# Altium PCB CEM3340_vco.PcbDoc (part 2 of 2)
Units mm, origin at the board's own origin, x right, y up, seen from the top; angles counter-clockwise.
Board outline 94 x 100 mm, 2 copper layers (Top Layer, Bottom Layer), stack 1.584 mm thick; 145 components, 81 nets, 415 pads, 466 vias.
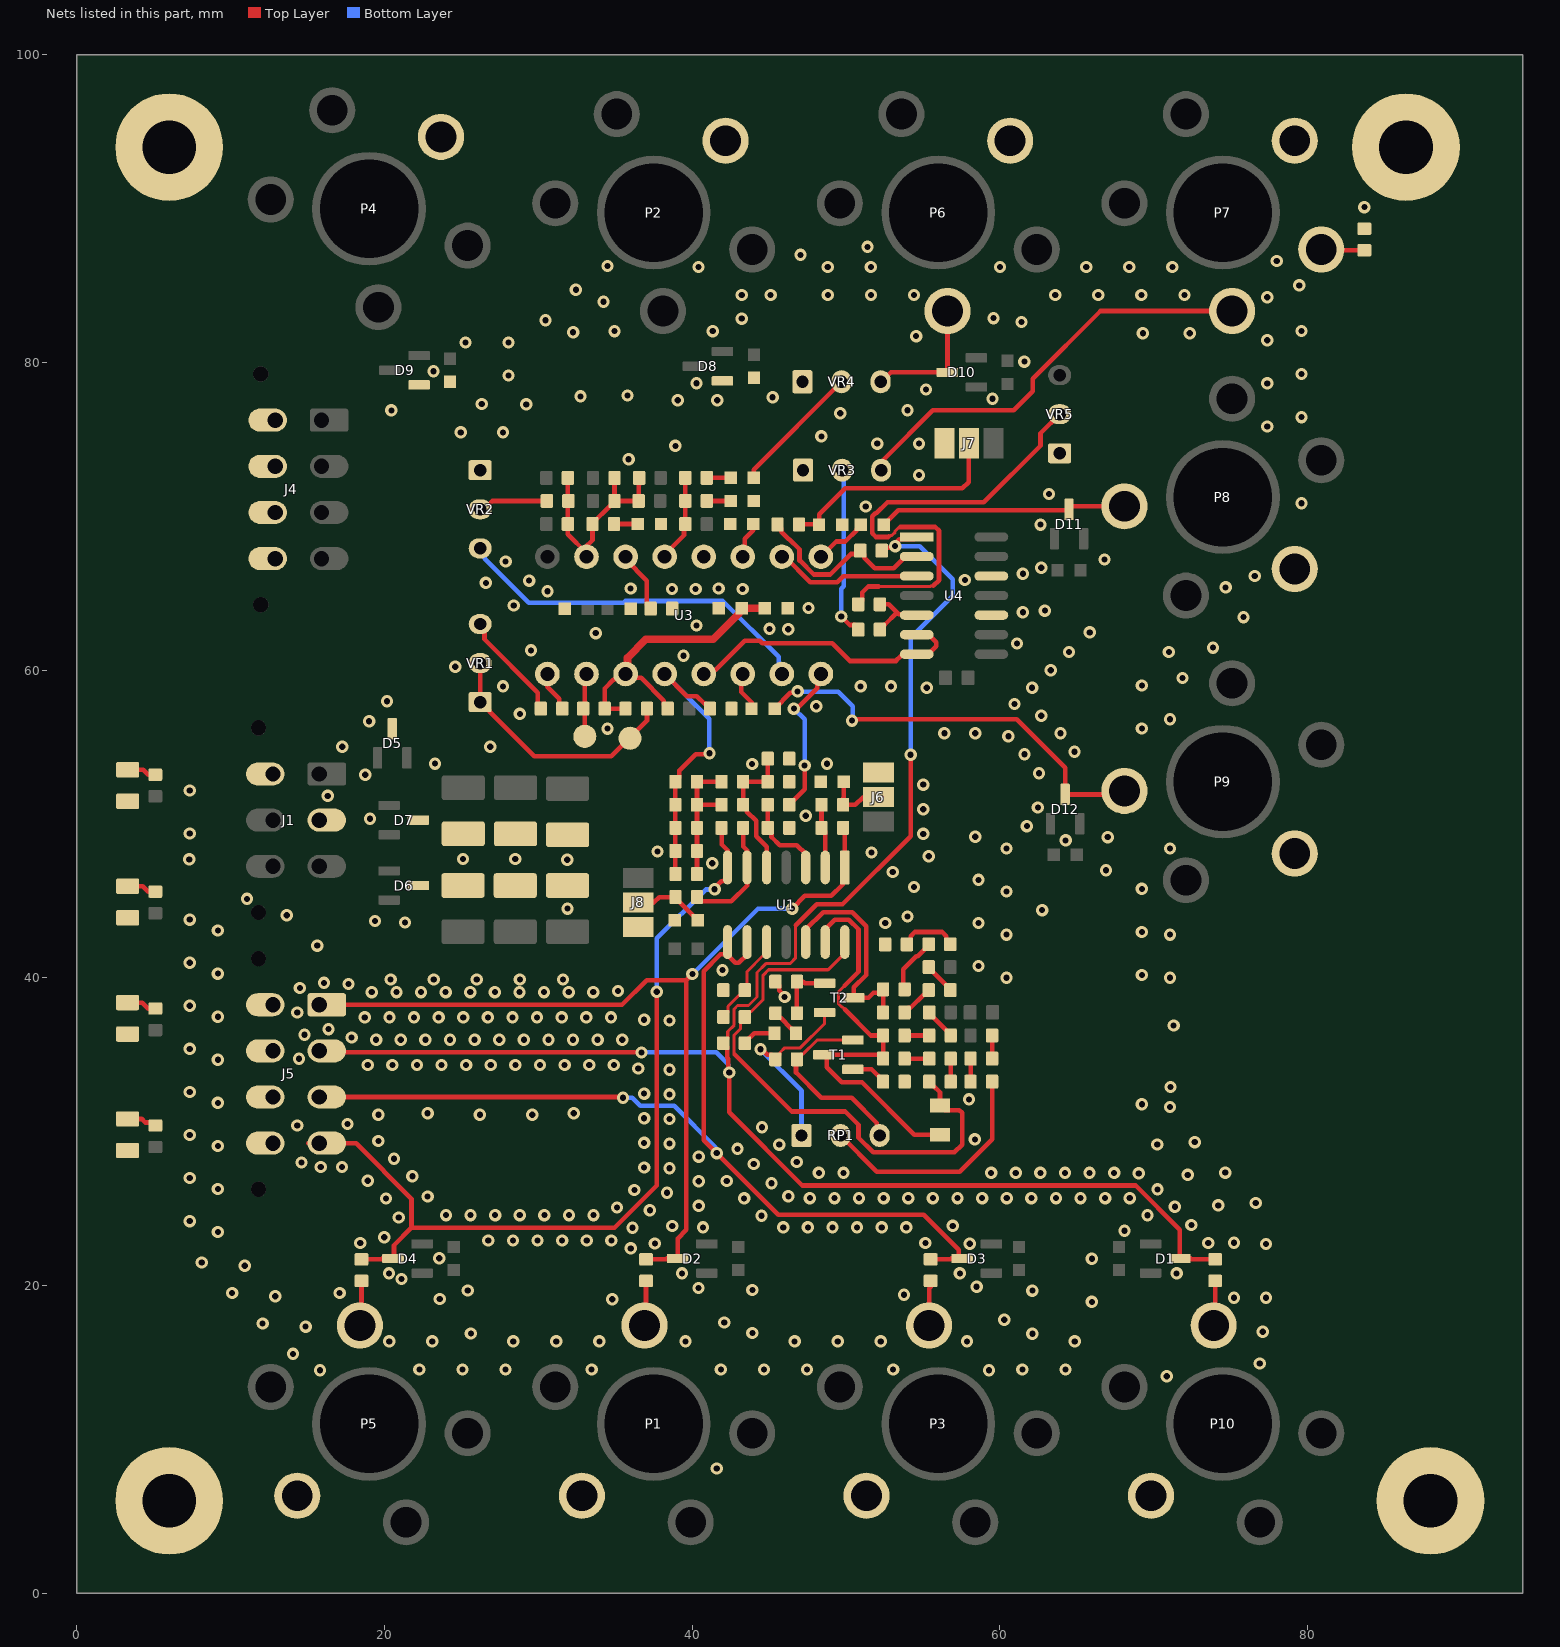
[diagram p2: the nets of this part, all layers, seen from the top]

## Via types
v1: diameter 0.8, hole 0.4, Top Layer to Bottom Layer, 466 vias

## Nets (pads, with @x,y where several pads share a name; then routed paths per layer and width w, separated by ;. In a path a pad name is that pad's centre, name@x,y a point inside that pad or via, vN(x,y) a via of type N, cw(c..) or ccw(c..) an arc to the next point about the centre after c; other vN are vias at no path point) (continued)
GND: C3.2 C5.1 C6.1 C7.1 C8.2 C11.1 C12.1 C13.1 C18.1 C19.1 C23.1 C24.2 CK1.2 CK3.2 CK4.2 CK5.2 CK6.2 CK7.2 D5.3 D6.3 D7.3 D8.1 D9.1 DL1.1 DL2.1 DL3.1 DL4.1 J1.2 J1.4 J4.5 J4.6 J4.7 J4.8 J5.5 J5.6 J5.7 J5.8 J6.1 J7.1 J8.1 P1.1 P2.1 P3.1 P4.1 P5.1 P6.1 P7.1 P8.1 P9.1 P10.1 pad.2 R6.1 R15.1 R17.1 R33.1 R34.1 R36.2 R43.1 R55.2 R56.2 R58.1 U3.12 U4.10 U4.12 VR2.1 VR3.1 VR4.1 VR5.1 | length 1.3
  Top Layer w0.3: R33.1@45.41,39.75 45.66,39.5 45.66,39.173 46.008,38.825 46.008,38.81 v1(46.008,38.747)
  other v1: 41.6,8.1 70.85,14.1 15.8,14.484 59.3,14.484 22.263,14.535 25.063,14.535 27.863,14.535 33.463,14.535 41.863,14.535 44.663,14.535 47.463,14.535 53.063,14.535 61.463,14.535 64.263,14.535 76.9,14.93 14.054,15.552 20.302,16.365 23.102,16.365 28.367,16.365 31.167,16.365 33.967,16.365 39.567,16.365 46.662,16.365 49.462,16.365 52.262,16.365 57.862,16.365 64.869,16.365 62.115,16.866 25.614,16.879 43.915,16.904 77.089,16.994 14.871,17.322 12.075,17.532 42.085,17.588 60.285,17.767 65.985,18.932 34.802,19.1 23.585,19.123 75.22,19.2 77.3,19.2 12.891,19.302 53.765,19.4 10.095,19.512 17.08,19.512 25.415,19.672 62.115,19.666 43.915,19.704 40.416,19.835 58.491,19.917 21.104,20.419 20.289,20.785 39.343,20.785 57.401,20.785 71.496,20.785 10.911,21.282 8.115,21.492 65.985,21.732 23.558,21.768 36.004,22.411 77.3,22.7 37.572,22.731 58.044,22.715 73.547,22.761 18.423,22.766 55.159,22.766 75.22,22.774 26.747,22.928 28.347,22.928 29.947,22.928 31.547,22.928 33.147,22.928 34.747,22.928 19.98,23.134 9.165,23.47 68.107,23.56 36.117,23.754 40.7,23.778 45.919,23.778 47.519,23.778 49.119,23.778 50.719,23.778 52.319,23.778 53.919,23.778 38.702,23.864 56.94,23.873 72.454,23.929 7.335,24.181 20.928,24.423 44.507,24.53 23.99,24.572 25.59,24.572 27.19,24.572 28.79,24.572 30.39,24.572 31.99,24.572 33.59,24.572 69.602,24.568 37.248,24.886 35.11,25.072 71.38,25.115 40.432,25.173 74.198,25.209 76.636,25.357 20.1,25.65 43.376,25.662 47.649,25.678 49.249,25.678 50.849,25.678 52.449,25.678 54.049,25.678 55.649,25.678 57.249,25.678 58.849,25.678 60.449,25.678 62.049,25.678 63.649,25.678 65.249,25.678 66.849,25.678 68.449,25.678 22.8,25.787 46.254,25.8 38.367,26.03 36.241,26.204 70.249,26.246 9.165,26.27 45.16,26.648 40.432,26.773 42.244,26.793 18.907,26.81 7.335,26.981 21.81,27.1 72.218,27.188 69.034,27.287 48.234,27.322 49.834,27.322 59.434,27.322 61.034,27.322 62.634,27.322 64.234,27.322 65.834,27.322 67.434,27.322 74.656,27.337 38.522,27.622 36.878,27.672 15.85,27.7 17.229,27.7 44,27.9 14.6,28 46.797,28.026 20.614,28.241 40.432,28.373 42.948,28.881 9.165,29.07 45.666,29.157 70.238,29.168 38.522,29.222 36.878,29.272 72.676,29.317 19.6,29.387 58.377,29.5 7.335,29.781 44.534,30.288 14.328,30.4 17.589,30.5 38.522,30.822 36.878,30.872 19.6,31.1 26.2,31.1 29.6,31.1 22.8,31.2 32.3,31.2 71.065,31.607 69.235,31.783 9.165,31.87 58,32.1 38.522,32.422 36.878,32.472 7.335,32.581 71.1,32.9 38.522,34.022 36.492,34.111 18.907,34.328 20.507,34.328 22.107,34.328 23.707,34.328 25.307,34.328 26.907,34.328 28.507,34.328 30.107,34.328 31.707,34.328 33.307,34.328 34.907,34.328 9.165,34.67 14.435,34.741 7.335,35.381 19.456,35.972 21.056,35.972 22.656,35.972 24.256,35.972 25.856,35.972 27.456,35.972 29.056,35.972 30.656,35.972 32.256,35.972 33.856,35.972 35.456,35.972 17.863,36.116 14.803,36.298 16.36,36.666 71.3,36.9 38.522,37.222 36.878,37.272 18.718,37.428 20.318,37.428 21.918,37.428 23.518,37.428 25.118,37.428 26.718,37.428 28.318,37.428 29.918,37.428 31.518,37.428 33.118,37.428 34.718,37.428 9.165,37.47 14.328,37.751 7.335,38.181 19.173,39.072 20.773,39.072 22.373,39.072 23.973,39.072 25.573,39.072 27.173,39.072 28.773,39.072 30.373,39.072 31.973,39.072 33.573,39.072 35.172,39.145 14.498,39.342 17.662,39.597 16.064,39.672 20.399,39.885 23.199,39.885 25.999,39.885 28.799,39.885 31.599,39.885 60.44,40.008 71.065,40.007 69.235,40.183 9.165,40.27 41.974,40.5 58.61,40.767 7.335,40.981 15.625,42.091 60.44,42.808 71.065,42.807 69.235,42.983 9.165,43.07 52.55,43.567 58.61,43.567 21.337,43.598 19.376,43.69 7.335,43.781 54.002,43.991 13.645,44.071 62.75,44.4 31.9,44.5 11.055,45.135 60.44,45.608 69.235,45.783 54.415,45.904 58.61,46.367 53.037,46.874 66.9,46.995 41.305,47.45 31.88,47.678 7.3,47.7 25.1,47.729 28.5,47.729 55.38,47.9 51.66,48.141 37.748,48.213 60.44,48.408 71.065,48.407 64.277,48.935 67.016,49.145 58.4,49.17 55.022,49.359 7.335,49.381 61.76,49.863 19.05,50.338 47.384,50.532 55.022,50.959 62.472,51.075 16.31,51.828 7.339,52.178 55.022,52.559 18.748,53.206 62.55,53.3 43.9,53.9 23.279,53.926 48.767,53.919 61.6,54.532 64.859,54.7 17.25,55.025 26.874,55.025 60.555,55.7 56.395,55.9 58.4,55.9 63.95,55.901 34.5,56.2 69.235,56.203 19,56.68 71.065,56.807 62.69,57.041 28.8,57.162 48.067,57.652 60.952,57.8 20.159,57.979 55.25,58.859 62.1,58.862 27.7,58.95 50.95,58.95 52.928,58.95 69.235,59.003 71.877,59.486 63.31,59.994 24.6,60.22 39.432,60.937 64.502,61.186 70.99,61.186 29.526,61.288 73.857,61.466 61.121,61.734 33.731,62.41 65.85,62.46 46.25,62.659 45.028,62.685 40.282,62.9 75.837,63.446 61.5,63.766 62.928,63.873 47.559,64.046 28.4,64.2 30.589,65.135 38.69,65.278 40.226,65.278 43.282,65.278 35.998,65.31 41.72,65.31 74.681,65.381 26.59,65.678 29.4,65.82 57.726,65.863 76.573,66.118 61.5,66.27 62.69,66.663 27.871,67.063 66.8,67.2 62.644,69.462 51.287,70.641 79.609,70.849 63.193,71.455 54.75,72.678 35.87,73.71 38.905,74.582 52.028,74.726 54.75,74.726 48.4,75.2 24.955,75.46 27.7,75.46 77.385,75.844 79.609,76.449 49.625,76.7 20.442,76.891 54,76.9 29.21,77.281 26.32,77.3 39.06,77.543 41.634,77.543 59.528,77.65 45.23,77.743 32.744,77.8 35.8,77.862 55.204,78.25 40.28,78.65 77.385,78.644 28.061,79.158 79.609,79.249 23.185,79.428 61.595,80.059 25.261,81.307 28.061,81.307 77.385,81.444 54.56,81.715 69.3,81.9 72.35,81.9 32.261,81.967 34.95,82.04 41.335,82.04 79.609,82.049 61.415,82.64 30.459,82.753 43.221,82.854 59.585,82.886 34.24,83.947 77.385,84.244 43.221,84.385 45.1,84.385 48.821,84.385 51.621,84.385 54.421,84.385 63.604,84.385 66.404,84.385 69.204,84.385 72.004,84.386 32.439,84.733 79.463,85.017 40.415,86.215 48.815,86.215 51.615,86.215 60.015,86.215 65.615,86.215 68.415,86.215 71.215,86.215 34.49,86.28 78,86.6 47.045,87 51.4,87.517 83.7,90.1
Hard_sync: C2.1 D12.3 P9.4 | length 27.8
  Top Layer w0.3: C2.1@45.36,57.5 46.386,58.526 46.762,58.526 v1(46.858,58.622) ; v1(50.394,56.718) 50.476,56.8 61.1,56.8 64.25,53.65 D12.3@64.25,51.92 67.87,51.92 P9.4@68.1,52.15
  Bottom Layer w0.3: v1(46.858,58.622) 46.88,58.6 49.495,58.6 50.443,57.652 50.443,56.767 v1(50.394,56.718)
Lin_FM: C4.1 VR4.2 | length 8.6
  Top Layer w0.3: C4.1@44,72.5 44,73.04 VR4.2@49.71,78.75
NetC1_2: C1.2 U3.9 | length 3.5
  Top Layer w0.3: U3.9@48.37,67.37 49.363,68.363 49.958,68.363 50.702,69.107 50.702,69.2 C1.2@50.952,69.45
NetC2_2: C2.2 U3.6 | length 2.6
  Top Layer w0.3: U3.6@43.29,59.75 43.18,59.64 43.18,58.58 43.86,57.9 C2.2@43.86,57.5
NetC3_1: C3.1 R13.2 | length 1.5
  Top Layer w0.3: R13.2@34.92,69.5 C3.1@36.47,69.5
NetC4_2: C4.2 R16.2 | length 1.6
  Top Layer w0.3: R16.2@40.95,72.5 C4.2@42.5,72.5
NetC5_2: C5.2 U3.11 | length 2.4
  Top Layer w0.3: U3.11@43.29,67.37 43.419,67.499 43.419,68.549 43.97,69.1 C5.2@43.97,69.5
NetC6_2: C6.2 R18.1 | length 1.6
  Top Layer w0.3: R18.1@40.95,71 C6.2@42.5,71
NetC8_1: C8.1 C24.1 R1.2 R2.2 R3.2 U3.3 | length 19.7
  Top Layer w0.3: R3.2@35.66,57.5 R2.2@34.31,57.5 34.31,58.81 34.876,59.376 34.944,59.376 35.318,59.75 U3.3@35.67,59.75 ; U3.3@35.799,59.879 35.979,59.879 35.979,59.793 36.271,59.501 36.68,59.501 38.16,58.021 38.16,57.75 R1.2@38.41,57.5
  Top Layer w0.5: U3.3@35.67,59.75 35.799,59.879 35.799,60.813 36.988,62.002 41.378,62.002 43.07,63.694 43.07,63.876 C8.1@43.22,64.026 ; C8.1@43.22,64.088 43.282,64.026 C24.1@44.72,64.026
NetC10_1: C10.1 R23.2 R27.1 T1.3 U1.13 | length 27.3
  Top Layer w0.2: 49.92,37.95 49.77,38.1 49.721,38.1 49.51,38.311 49.51,39.09 49.92,39.5
  Top Layer w0.3: U1.13@48.65,42.325 48.65,43.165 49.26,43.775 50.189,43.775 50.811,43.153 50.811,40.391 49.92,39.5 ; T1.3@48.75,34.844 48.75,34.188 49.727,33.211 51.039,33.211 54.45,29.8 C10.1@56.11,29.8 ; T1.3@49.241,35 52.16,35 R23.2@52.41,34.75 R27.1@52.41,36.25 51.62,36.25 49.92,37.95
NetC10_2: C10.2 R25.1 R57.2 U1.14 | length 36.3
  Top Layer w0.2: 42.783,35 42.726,35.057 42.726,36.277 43.148,36.7 43.148,37.173 R57.2@43.426,37.45 43.426,37.5 43.726,37.8 43.822,37.8 44.61,38.588 44.61,40.177 44.958,40.525 48.836,40.525 49.686,41.375 49.689,41.375 49.92,41.606 U1.14@49.92,42.325
  Top Layer w0.3: 42.783,35 46.473,31.31 49.94,31.31 50.811,30.439 50.811,29.614 51.776,28.65 57.05,28.65 57.55,29.15 57.55,31.224 57.374,31.4 56.41,31.4 C10.2@56.11,31.7 56.11,32.55 55.71,32.95 55.66,32.95 55.41,33.2 R25.1@55.41,33.25
NetC11_2: C11.2 J6.3 R40.2 | length 4
  Top Layer w0.3: C11.2@49.86,52.75 49.86,51.75 49.81,51.7 R40.2@49.81,51.25 50.61,51.25 51.11,51.75 J6.3@52.11,51.75
NetC12_2: C12.2 J7.3 R44.2 | length 15.1
  Top Layer w0.3: R44.2@46.95,69.475 48.225,69.475 C12.2@48.25,69.45 48.25,70.129 49.939,71.817 57.567,71.817 57.976,72.226 57.976,74.726 J7.3@58,74.75
NetC13_2: C13.2 J8.3 R51.2 | length 4.7
  Top Layer w0.3: J8.3@36.5,44.9 37.5,44.9 37.85,45.25 R51.2@38.91,45.25 38.91,45.2 C13.2@40.36,43.75
NetD10_3: D10.3 P6.4 VR4.3 | length 8.6
  Top Layer w0.3: VR4.3@52.25,78.75 52.317,78.75 52.926,79.359 D10.3@56.581,79.359 56.581,79.659 56.6,79.679 P6.4@56.6,83.35
NetDL1_2: DL1.2 R65.1 | length 1.9
  Top Layer w0.3: DL1.2@3.3,53.525 4.325,53.525 4.65,53.2 R65.1@5.1,53.2
NetDL2_2: DL2.2 R66.1 | length 1.9
  Top Layer w0.3: DL2.2@3.3,45.958 4.292,45.958 4.65,45.6 R66.1@5.1,45.6
NetDL3_2: DL3.2 R67.1 | length 2
  Top Layer w0.3: DL3.2@3.3,38.392 4.258,38.392 4.65,38 R67.1@5.1,38
NetDL4_2: DL4.2 R68.2 | length 2
  Top Layer w0.3: DL4.2@3.3,30.825 4.225,30.825 4.455,30.595 4.905,30.595 R68.2@5.1,30.4
NetP1_4: P1.4 R62.2 | length 2.9
  Top Layer w0.3: P1.4@36.9,17.4 37,17.5 R62.2@37,20.3
NetP3_4: P3.4 R63.2 | length 2.9
  Top Layer w0.3: P3.4@55.4,17.4 55.4,19.8 55.5,19.9 R63.2@55.5,20.3
NetP5_4: P5.4 R64.2 | length 2.8
  Top Layer w0.3: P5.4@18.5,17.5 R64.2@18.5,20.3
NetP7_5: P7.5 R6.2 | length 2.8
  Top Layer w0.3: P7.5@80.9,87.35 80.95,87.3 R6.2@83.7,87.3
NetP10_4: P10.4 R61.2 | length 3
  Top Layer w0.3: P10.4@74,17.25 R61.2@74,20.3
NetR2_1: R2.1 TP2.1 U3.2 | length 4.3
  Top Layer w0.3: TP2.1@33.02,55.5 33.02,59.64 U3.2@33.13,59.75
NetR3_1: R3.1 TP1.1 VR1.1 VR1.2 | length 16.4
  Top Layer w0.3: VR1.2@26.25,60.25 26.22,60.22 VR1.1@26.22,57.92 26.32,57.92 26.82,57.42 26.82,57.32 29.74,54.4 34.743,54.4 TP1.1@35.843,55.5 ; TP1.1@35.843,55.5 37.06,56.717 R3.1@37.06,57.5
NetR4_1: R4.1 VR1.3 | length 7
  Top Layer w0.3: VR1.3@26.5,63 26.5,62 29.965,58.535 29.965,57.695 R4.1@30.16,57.5
NetR4_2: R4.2 U3.1 | length 2.7
  Top Layer w0.3: U3.1@30.59,59.75 30.579,59.739 30.579,58.931 31.365,58.145 31.365,57.695 R4.2@31.56,57.5
NetR5_2: R5.2 R7.2 R8.2 R9.2 R10.2 R11.2 R12.1 R13.1 U3.15 | length 14.4
  Top Layer w0.3: R9.2@31.92,72.5 31.92,71 R5.2@31.92,69.5 31.92,68.83 33.13,67.62 U3.15@33.13,67.37 ; U3.15@33.02,67.62 33.02,67.946 33.52,68.446 33.52,69.55 34.67,70.7 34.7,70.7 34.95,70.95 R10.2@34.95,71 ; R8.2@34.95,72.5 R10.2@34.95,71 ; R11.2@36.55,72.5 36.55,72.05 36.52,72.02 R7.2@36.52,71 R10.2@34.95,71
NetR12_2: R12.2 VR2.2 | length 4.6
  Top Layer w0.3: VR2.2@26.25,70.25 27,71 R12.2@30.55,71
NetR14_1: R14.1 R16.1 R18.2 U3.13 | length 5.7
  Top Layer w0.3: U3.13@38.21,67.37 38.21,67.518 39.468,68.776 39.468,69.418 R14.1@39.55,69.5 R18.2@39.55,71 R16.1@39.55,72.5
NetR15_2: R15.2 R46.1 R47.1 R48.1 R49.1 R50.1 U3.4 | length 19.5
  Top Layer w0.3: U3.4@38.21,59.75 39.66,58.3 40.308,58.3 40.808,57.8 40.91,57.8 41.16,57.55 R15.2@41.16,57.5 ; R47.1@38.91,46.75 R49.1@38.91,48.25 R48.1@38.91,49.75 R46.1@38.91,51.25 R50.1@38.91,52.75 39.16,53 39.16,53.475 40.226,54.541 41.061,54.541 v1(41.12,54.6)
  Bottom Layer w0.3: U3.4@38.21,59.75 41.12,56.84 v1(41.12,54.6)
NetR17_2: R17.2 U3.14 | length 4
  Top Layer w0.3: U3.14@35.67,67.37 35.67,67.2 37.05,65.82 37.05,64.25 R17.2@37.3,64
NetR19_1: R19.1 R21.2 | length 2.1
  Top Layer w0.3: R19.1@55.38,40.7 55.38,40.65 56.525,39.505 56.53,39.505 56.78,39.255 R21.2@56.78,39.205
NetR20_1: R20.1 R22.2 | length 1.7
  Top Layer w0.3: R20.1@55.66,37.45 56.56,36.55 56.81,36.3 R22.2@56.81,36.25
NetR21_1: R21.1 R26.2 | length 2.2
  Top Layer w0.3: R26.2@53.81,37.75 53.81,37.8 54.06,38.05 54.194,38.05 55.049,38.905 55.13,38.905 55.38,39.155 R21.1@55.38,39.205
NetR22_1: R22.1 R27.2 | length 1.6
  Top Layer w0.3: R27.2@53.81,36.25 R22.1@55.41,36.25
NetR23_1: R23.1 R24.2 | length 1.6
  Top Layer w0.3: R23.1@53.81,34.75 R24.2@55.41,34.75
NetR24_1: R24.1 R25.2 | length 1.5
  Top Layer w0.3: R25.2@56.81,33.25 R24.1@56.81,34.75
NetR26_1: R26.1 R28.1 T2.3 U1.12 | length 14.2
  Top Layer w0.3: U1.12@47.38,42.325 47.38,43.146 48.509,44.275 50.396,44.275 51.311,43.36 51.311,40.184 50.51,39.383 T2.3@50.51,38.7 50.961,38.7 51.46,38.7 51.79,39.03 52.19,39.03 R28.1@52.41,39.25 R26.1@52.41,37.75
NetR28_2: R28.2 R32.1 | length 3.7
  Top Layer w0.3: R28.2@53.81,39.25 53.728,39.332 53.728,40.568 54.569,41.409 54.659,41.409 55.38,42.13 R32.1@55.38,42.18
NetR29_2: R29.2 R30.1 | length 2.2
  Top Layer w0.3: R29.2@43.426,35.75 43.426,35.8 44.026,36.4 R30.1@45.353,36.4
NetR30_2: R30.2 R31.1 | length 1.9
  Top Layer w0.3: R31.1@45.41,37.7 45.41,37.65 45.66,37.4 45.753,37.4 46.453,36.7 46.503,36.7 46.753,36.45 R30.2@46.753,36.4
NetR31_2: R31.2 R33.2 T2.1 | length 3.9
  Top Layer w0.3: R31.2@46.81,37.7 R33.2@46.81,39.75 47.21,39.75 47.31,39.65 T2.1@48.61,39.65
NetR32_2: R32.2 R36.1 | length 3.8
  Top Layer w0.3: R36.1@53.95,42.168 54.2,42.418 54.2,42.704 54.476,42.98 56.254,42.98 56.53,42.704 56.53,42.43 R32.2@56.78,42.18
NetR34_2: R34.2 T1.1 | length 2.3
  Top Layer w0.3: T1.1@50.45,34.05 51.66,34.05 52.41,33.3 R34.2@52.41,33.25
NetR35_1: R35.1 RP1.3 T1.2 | length 12.2
  Top Layer w0.2: R35.1@47.196,35.035 48.111,35.95 T1.2@50.45,35.95
  Top Layer w0.3: R35.1@46.81,34.7 46.753,34.643 46.753,33.847 48.4,32.2 50.361,32.2 51.999,30.563 51.999,29.941 RP1.3@52.19,29.75 ; R35.1@46.953,34.893 47.06,35 R35.1@47.09,35
NetR35_2: R35.2 RP1.1 T2.2 | length 12.9
  Top Layer w0.2: R35.2@45.41,34.7 45.71,35 45.71,35.145 46.015,35.45 47.03,35.45 48.61,37.03 T2.2@48.61,37.75
  Top Layer w0.3: v1(44.443,35.355) 44.512,35.355 44.869,34.998 45.16,34.998 45.41,34.748 R35.2@45.41,34.724
  Bottom Layer w0.3: v1(44.443,35.355) 44.443,35.329 47.11,32.661 RP1.1@47.11,29.75
NetR37_1: R37.1 R38.2 | length 1.5
  Top Layer w0.3: R37.1@58.1,33.25 R38.2@58.1,34.75
NetR37_2: R37.2 RP1.2 | length 15.4
  Top Layer w0.3: RP1.2@49.65,29.75 52,27.4 57.4,27.4 59.5,29.5 R37.2@59.5,33.25
NetR38_1: R38.1 R39.2 | length 1.5
  Top Layer w0.3: R38.1@59.5,34.75 R39.2@59.5,36.25
NetR40_1: R40.1 R41.2 U1.2 | length 4.2
  Top Layer w0.3: R40.1@48.41,51.25 R41.2@48.41,49.75 48.65,49.51 U1.2@48.65,47.175
NetR42_1: R42.1 R43.2 U1.3 | length 5.8
  Top Layer w0.3: R43.2@44.91,49.7 R42.1@44.91,51.25 ; R43.2@44.91,49.75 45.155,49.505 45.155,49.155 45.685,48.625 46.81,48.625 47.38,48.055 U1.3@47.38,47.175
NetR42_2: R42.2 U3.8 | length 10.1
  Top Layer w0.3: R42.2@46.31,51.25 46.31,51.3 46.56,51.55 46.61,51.55 47.31,52.25 v1(47.31,53.8) ; v1(46.61,57.5) 46.706,57.596 46.892,57.596 48.124,58.828 48.124,59.504 U3.8@48.37,59.75
  Bottom Layer w0.3: v1(46.61,57.5) 47.31,56.8 v1(47.31,53.8)
NetR44_1: R44.1 R45.2 U4.2 | length 12.6
  Top Layer w0.3: R44.1@45.55,69.475 45.8,69.225 45.8,69.01 46.29,68.52 46.306,68.52 46.98,67.846 46.98,67.134 47.894,66.22 48.985,66.22 50.314,67.55 50.702,67.55 R45.2@50.928,67.775 51.178,67.525 51.178,67.31 51.87,66.618 53.099,66.618 53.688,67.207 53.688,67.401 54.586,67.401 U4.2@54.599,67.388
NetR46_2: R46.2 R47.2 R48.2 R49.2 R50.2 R53.1 R54.1 | length 9.2
  Top Layer w0.3: R47.2@40.31,46.75 R49.2@40.31,48.25 R48.2@40.31,49.75 R46.2@40.31,51.25 ; R53.1@41.91,51.25 R46.2@40.31,51.25 ; R54.1@41.91,52.75 41.51,52.75 R50.2@40.31,52.75 R46.2@40.31,51.25
NetR51_1: R51.1 R52.2 U1.6 | length 7.7
  Top Layer w0.3: R51.1@40.31,45.25 40.31,45.224 40.56,44.974 42.544,44.974 43.57,46 U1.6@43.57,47.175 43.57,48.275 43.31,48.535 R52.2@43.31,49.75
NetR53_2: R53.2 R54.2 R55.1 R56.1 U1.5 | length 9.3
  Top Layer w0.3: U1.5@44.84,47.175 44.84,48.522 44.16,49.202 44.16,50.198 43.56,50.798 43.56,51 R53.2@43.31,51.25 R54.2@43.31,52.75 43.71,52.75 R55.1@44.91,52.75 R56.1@44.91,54.25
NetR57_1: R57.1 R58.2 U1.10 | length 6.1
  Top Layer w0.2: R57.1@42.026,37.45 42.326,37.75 42.326,38.143 43.03,38.847 43.126,38.847 43.426,39.147 R58.2@43.426,39.197 43.57,39.342 43.57,40.41 44.608,41.448 44.655,41.448 44.84,41.633 U1.10@44.84,42.325
NetR59_2: R59.2 VR3.2 | length 11.1
  Top Layer w0.3: v1(49.696,63.483) 50.244,62.935 50.55,62.935 50.8,62.685 R59.2@50.8,62.635
  Bottom Layer w0.3: v1(49.696,63.483) 49.696,65.294 49.847,65.445 49.847,72.903 VR3.2@49.75,73
NetU3_7: U3.7 VR2.3 | length 23.3
  Bottom Layer w0.3: VR2.3@26.469,67.5 26.511,67.458 26.511,67.239 29.365,64.385 35.53,64.385 35.645,64.5 41.988,64.5 45.621,60.867 45.621,59.959 U3.7@45.83,59.75
NetU3_10: U3.10 U4.3 | length 9.6
  Top Layer w0.3: U3.10@45.83,67.37 46.037,67.37 47.687,65.72 49.42,65.72 49.818,66.118 U4.3@54.599,66.118
pw_input: P7.4 VR3.3 | length 27.9
  Top Layer w0.3: VR3.3@52.29,73 52.481,73.191 52.481,73.731 55.65,76.9 60.902,76.9 62.139,78.138 62.139,78.942 66.547,83.35 P7.4@75.1,83.35
pw_offset: R60.2 VR5.2 | length 30.8
  Top Layer w0.2: 52.132,65.44 53.542,65.44 53.55,65.448 55.5,65.448 55.535,65.483 55.683,65.483 ; 52.773,68.695 52.847,68.695 52.902,68.75 52.976,68.75 53.199,68.973 53.199,69.047 53.41,69.258 53.484,69.258 53.534,69.308
  Top Layer w0.3: R60.2@50.8,64.28 51.05,64.53 51.05,65.05 51.44,65.44 52.132,65.44 ; 52.773,68.695 52.735,68.658 51.949,68.658 51.702,68.905 51.702,69.995 51.907,70.2 51.978,70.2 52.695,70.917 58.961,70.917 62.644,74.601 62.644,75.392 VR5.2@63.891,76.64 ; 53.534,69.308 55.809,69.308 56.049,69.068 56.049,65.849 55.683,65.483
PWM_ctrl: U3.5 U4.6 U4.7 | length 18.7
  Top Layer w0.3: U3.5@40.75,59.75 40.999,59.999 41.499,59.999 43.424,61.924 44.387,61.924 44.561,61.75 49.106,61.75 50.256,60.6 53.247,60.6 53.595,60.948 53.627,60.948 53.718,61.038 55.352,61.038 55.876,61.562 55.876,61.811 55.378,62.308 U4.6@54.599,62.308
PWM_ctrl_sum: R59.1 R60.1 U4.5 | length 4.3
  Top Layer w0.3: R59.1@52.2,62.635 52.2,62.685 52.45,62.935 52.505,62.935 53.3,63.73 53.34,63.73 ; R60.1@52.2,64.28 52.79,64.28 53.34,63.73 ; U4.5@54.599,63.578 53.718,63.578 53.66,63.636 53.434,63.636 53.34,63.73
PWM_OUT: D4.3 J5.4 R52.1 R64.1 U1.7 | length 57.5
  Top Layer w0.3: J5.4@15.038,29.25 16.25,29.25 18.15,29.25 21.75,25.65 21.75,23.75 ; R64.1@18.5,21.7 19.8,21.7 19.85,21.75 D4.3@20.55,21.75 20.614,21.814 20.614,22.614 21.75,23.75 ; v1(37.7,39.097) 37.7,26.5 34.95,23.75 21.75,23.75 ; v1(41.46,45.759) 41.46,45.842 41.886,46.268 41.974,46.268 42.024,46.318 42.161,46.318 42.3,46.456 U1.7@42.3,47.175 42.3,48.275 41.91,48.665 R52.1@41.91,49.75
  Bottom Layer w0.3: v1(37.7,39.097) 37.7,42.56 40.878,45.738 41.44,45.738 v1(41.46,45.759)
SAW_OUT: D2.3 J5.1 R41.1 R62.1 U1.1 | length 61.5
  Top Layer w0.3: J5.1@15.75,38.25 35.439,38.25 37.036,39.847 39.61,39.847 ; R62.1@37,21.7 38.3,21.7 38.35,21.75 D2.3@39.05,21.75 39.05,23.05 39.61,23.61 39.61,39.847 ; v1(40.01,40.247) 39.61,39.847 ; v1(46.5,44.5) 47.325,45.325 49.047,45.325 49.77,46.048 49.77,47.025 U1.1@49.92,47.175 49.92,49.64 R41.1@49.81,49.75
  Bottom Layer w0.3: v1(40.01,40.247) 40.025,40.247 44.278,44.5 v1(46.5,44.5)
SINE_OUT: D3.3 J5.3 R63.1 U1.8 U1.9 | length 66.4
  Top Layer w0.3: J5.3@15.75,32.25 35.45,32.25 v1(35.5,32.2) ; U1.8@42.3,41.468 42.791,40.977 43.039,40.977 43.57,41.508 U1.9@43.57,42.325 ; U1.8@42.3,42.325 42.3,41.659 42.161,41.521 41.844,41.521 40.76,40.437 40.76,29.44 v1(41.597,28.603) 45.6,24.6 55.05,24.6 57.326,22.324 57.326,21.9 D3.3@57.476,21.75 ; R63.1@55.5,21.7 56.8,21.7 56.85,21.75 D3.3@57.476,21.75 ; D3.3@57.55,21.709 D3.3@57.941,21.709 ; D3.3@57.55,21.75 D3.3@57.476,21.75
  Bottom Layer w0.3: v1(35.5,32.2) 35.507,32.193 36.096,32.193 36.617,31.672 38.833,31.672 41.501,29.004 41.501,28.699 v1(41.597,28.603)
Soft_sync: C1.1 D11.3 P8.4 | length 16.1
  Top Layer w0.3: C1.1@52.452,69.45 53.402,70.4 64.4,70.4 64.65,70.65 P8.4@68.1,70.65
TRIANGLE_OUT: D1.3 J5.2 R29.1 R45.1 R61.1 U4.1 | length 114.8
  Top Layer w0.2: R29.1@42.313,36.037 42.313,36.51 42.726,36.923 42.726,37.977 42.948,38.2 43.656,38.2 44.21,38.754 44.21,40.343 44.792,40.925 46.359,40.925 46.73,41.296 46.73,43.394 46.745,43.409
  Top Layer w0.3: J5.2@15.75,35.25 15.85,35.15 v1(36.7,35.15) ; R29.1@42.226,35.95 R29.1@42.026,35.75 42.276,35.5 42.276,34.8 42.346,34.73 42.346,33.978 42.408,33.916 v1(42.408,33.847) 42.408,31.252 47.16,26.5 68.833,26.5 71.7,23.633 D1.3@71.7,21.75 72.4,21.75 72.45,21.7 R61.1@74,21.7 ; 46.745,43.409 48.111,44.775 49.775,44.775 54.2,49.2 v1(54.2,54.5) ; R45.1@52.328,67.775 52.548,67.995 52.573,67.97 53.099,67.97 v1(53.195,68.066) ; v1@53.108,68.156 53.461,68.508 54.449,68.508 U4.1@54.599,68.658
  Bottom Layer w0.3: v1(36.7,35.15) 41.56,35.15 42.334,34.376 42.334,33.921 v1(42.408,33.847) ; v1@53.278,68.148 v1(53.195,68.066) 54.804,68.066 56.948,65.922 56.948,64.848 54.2,62.1 v1(54.2,54.5)
pads on no net: D6.1 D7.1 J1.# J4.4 J4.# J5.# P1.2 P1.3 P1.5 P1.6 P2.2 P2.3 P2.5 P2.6 P3.2 P3.3 P3.5 P3.6 P4.2 P4.3 P4.5 P4.6 P5.2 P5.3 P5.5 P5.6 P6.2 P6.3 P6.5 P6.6 P7.2 P7.3 P7.6 P8.2 P8.3 P8.5 P8.6 P9.2 P9.3 P9.5 P9.6 P10.2 P10.3 P10.5 P10.6 U4.8 U4.9 U4.13 U4.14

## Polygon pours and split planes (outlines as drawn)
GND on Top Layer "NONET_L-01_P-001" (solid, remove dead copper, pour order 1): 0,0 94,0 94,100 0,100
GND on Bottom Layer "NONET_L-01_P-001" (solid, remove dead copper, pour order 0): 0,0 94,0 94,100 0,100

## Silkscreen, mask and mechanical layers (free items; w line width, h text height)
Top Silkscreen:
  circle w0.15: c30.579,59.739 r1.15
  lines w0.15: 29.429,59.739 29.429,67.591 ; 33.78,55.068 34.45,54.398 34.45,53.612 ; 35.692,33 38.508,33 ; 35.809,54.6 35.835,54.574 35.835,53.602 ; 36.004,30.288 38.41,30.288 ; 39.61,53.602 38.535,53.602 38.31,53.377 38.31,40.05 38.798,39.562 38.798,30.195 39.405,29.588 41.117,29.588 ; 39.96,35.945 39.96,36.165 ; 39.963,37.138 39.963,37.358 ; 39.963,39.738 39.963,41.144 ; 39.967,33.508 39.967,33.728 ; 39.97,34.732 39.97,34.953 ; 39.97,38.288 39.97,38.508 ; 41.465,56.717 41.12,56.372 41.12,49.283 41.553,48.85 43.644,48.85 44.078,49.284 44.512,48.85 60.517,48.85 61.237,49.57 61.237,54.248 60.284,55.2 55.284,55.2 55.284,54.5 ; 41.816,29.588 43.748,29.588 44.119,29.959 44.119,37.115 43.934,37.3 ; 42.61,53.358 42.61,53.681 ; 44.089,49.296 44.089,54.7 44.611,55.222 45.455,55.222 ; 44.219,38.096 44.219,37.854 44.428,37.646 44.753,37.646 ; 45.611,40.756 46.111,40.756 46.166,40.701 46.166,40.419 ; 46.068,88.155 46.068,84.914 46.277,84.705 ; 47.582,83.4 47.838,83.144 47.838,81.238 ; 53.257,70.6 53.682,70.175 62.392,70.175 ; 58.052,53.35 60.952,53.35
  lines w0.2: 6.3,67.253 10.153,67.253 ; 7.4,70.253 10.047,70.253 ; 7.5,73.3 10,73.3 ; 9.4,76.253 9.947,76.253 ; 19.308,32.199 ccw(c20.096,32.795) 20.878,32.189 ; 19.376,34.6 20.376,35.6 20.376,34.461 21.5,35.586 21.5,34.5 22.572,35.572 22.572,34.6 23.558,35.586 23.558,34.64 24.4,35.482 ; 19.376,37.6 20.376,38.6 21.35,37.626 22.3,38.576 23.199,37.677 24.098,38.576 24.098,38.502 ; 19.555,28.8 20.236,28.8 20.236,30 20.99,30 20.99,28.8 22.379,28.8 22.379,30 23.153,30 23.153,28.827 24.38,28.827 ; 20.882,32.171 cw(c21.664,31.566) 22.453,32.162 ccw(c23.234,32.767) 24.023,32.171 ; 42.783,35.05 42.783,34.845 43.376,34.252 43.376,33.7 ; 44.9,70.5 45,70.5 ; 50.3,70.5 51.5,70.5 ; 53.307,70.55 54.6,70.55 ; 57.8,42.2 60.8,42.2 ; 57.804,40.7 63.727,40.7 ; 57.842,39.127 61,39.127 ; 60.325,33.161 60.975,33.161 ; 60.325,34.7 60.975,34.7 ; 60.325,36.2 60.975,36.2 ; 60.35,37.75 61,37.75
  lines w0.6: 35.024,44.325 35.024,47.355 ; 37.96,44.315 37.96,47.344 ; 50.65,49.412 50.65,52.441 ; 53.586,49.401 53.586,52.43 ; 57.309,73.29 60.338,73.29 ; 57.32,76.226 60.349,76.226
  text "CV1 precission" at 33.768,98.245 h1.5
  text "CV5" at 17.756,98.22 h1.5
  text "PW" at 73.212,98.12 h1.5
  text "FM linear" at 53.082,98.028 h1.5
  text "FM_lin_depth" at 47.613,88.18 h1.5 r90
  text "CV INPUTS" at 11.492,80.616 h1.2
  text "PW_mod_depth" at 69.588,79.487 h1.5
  text "100n" at 44.069,77.041 h0.7 r270
  text "triangle_offset" at 55.101,76.668 h1
  text "CV2_prec" at 4.245,76.116 h1.2
  text "GND" at 0.764,75.916 h1.2
  text "10n" at 44.069,75.467 h0.7 r270
  text "Soft_sync" at 83.053,74.427 h1.5 r270
  text "1n" at 44.065,74.137 h0.7 r270
  text "CV_4" at 4.245,72.983 h1.2
  text "GND" at 0.764,72.916 h1.2
  text "0V ---- 5V" at 56.358,72.379 h0.7
  text "PW_depth" at 57.168,70.127 h1.2
  text "GND" at 0.764,69.916 h1.2
  text "CV_3" at 4.245,69.849 h1.2
  text "GND" at 0.764,66.916 h1.2
  text "NC" at 4.245,66.916 h1.2
  text "Hi_freq_track" at 23.245,66.528 h1.5 r90
  text "-15 V" at 15.338,60.408 h1.2
  text "GND" at 11.7,60.403 h1.2
  text "I_scale" at 23.247,58.853 h1.5 r90
  text "+5 V" at 11.7,58.809 h1.2
  text "NC" at 15.287,58.803 h1.2
  text "+15 V" at 11.916,57.421 h1.2
  text "-12 V" at 15.338,57.214 h1.2
  text "POWER" at 11.397,57.2 h1.2 r90
  text "Hard_sync" at 83.061,56.164 h1.5 r270
  text "10k" at 43.789,55.543 h1
  text "trg_offs 0V - 5V" at 48.779,55.168 h1
  text "10k" at 58.854,54.304 h1
  text "100n" at 58.605,53.534 h1
  text "15 V" at 2.065,51.198 h1.5 r90
  text "10u" at 26.154,47.413 h1
  text "10u" at 29.608,47.384 h1
  text "12 V" at 2.082,43.598 h1.5 r90
  text "pwm_offs 0V - 5V" at 34.637,41.384 h1 r90
  text "CEM3340_VCO" at 74.735,38.145 h1.5
  text "JD May 2023" at 74.695,36.859 h1.5
  text "5 V" at 2.065,36.326 h1.5 r90
  text "10k" at 33.294,32.526 h1.5
  text "P" at 78.6,31 h6
  text "4k7" at 63.033,30.895 h1.5
  text "100p" at 57.608,29.971 h0.8
  text "100n" at 33.027,29.826 h1.5
  text "-15 V" at 2.065,28.223 h1.5 r90
  text "Sine_shape" at 54.815,28.043 h1.5
  text "A" at 80.3,26.4 h4 r0.06
  text "4x10k" at 6.779,24.875 h1.2 r90
  text "AUX OUT" at 12.225,24.216 h1.2
  text "E" at 83.1,18.9 h9
  text "PWM" at 16.949,0.859 h2
  text "SAW" at 35.511,0.859 h2
  text "SINE" at 53.599,0.859 h2
  text "TRIANGLE" at 71.492,0.859 h2
Bottom Silkscreen:
  text "CV5" at 24.344,83.02 h1.5
  text "PW" at 72.421,82.72 h1.5
  text "CV1 precission" at 43.432,80.245 h1.5
  text "FM linear" at 59.35,80.228 h1.5
  text "CV2_prec" at 23.255,76.016 h1.2
  text "GND" at 10.436,75.916 h1.2
  text "GND" at 10.436,72.916 h1.2
  text "CV_4" at 21.124,72.883 h1.2
  text "GND" at 10.436,69.916 h1.2
  text "CV_3" at 21.128,69.749 h1.2
  text "Soft_sync" at 64.253,67.808 h1.5 r270
  text "GND" at 10.436,66.916 h1.2
  text "NC" at 19.97,66.816 h1.2
  text "-15 V" at 20.836,52.921 h1.2
  text "GND" at 10.342,52.816 h1.2
  text "5 V" at 10.342,49.823 h1.2
  text "GND" at 20.582,49.816 h1.2
  text "Hard_sync" at 64.261,49.072 h1.5 r270
  text "15 V" at 10.342,46.921 h1.2
  text "12 V" at 20.395,46.814 h1.2
  text "GND GND GND GND" at 10.184,38.76 h1.2 r90
  text "SAW" at 20.492,37.816 h1.2
  text "TRIANGLE" at 23.442,34.816 h1.2
  text "SINE" at 20.899,31.816 h1.2
  text "PWM" at 20.929,28.816 h1.2
  text "PWM" at 20.151,19.959 h2
  text "SAW" at 38.589,19.959 h2
  text "SINE" at 56.701,19.959 h2
  text "TRIANGLE" at 79.408,19.959 h2
Panel Outline:
  the board outline again, w0.2